# Allegro board IRRIGATION_PROJECT.brd
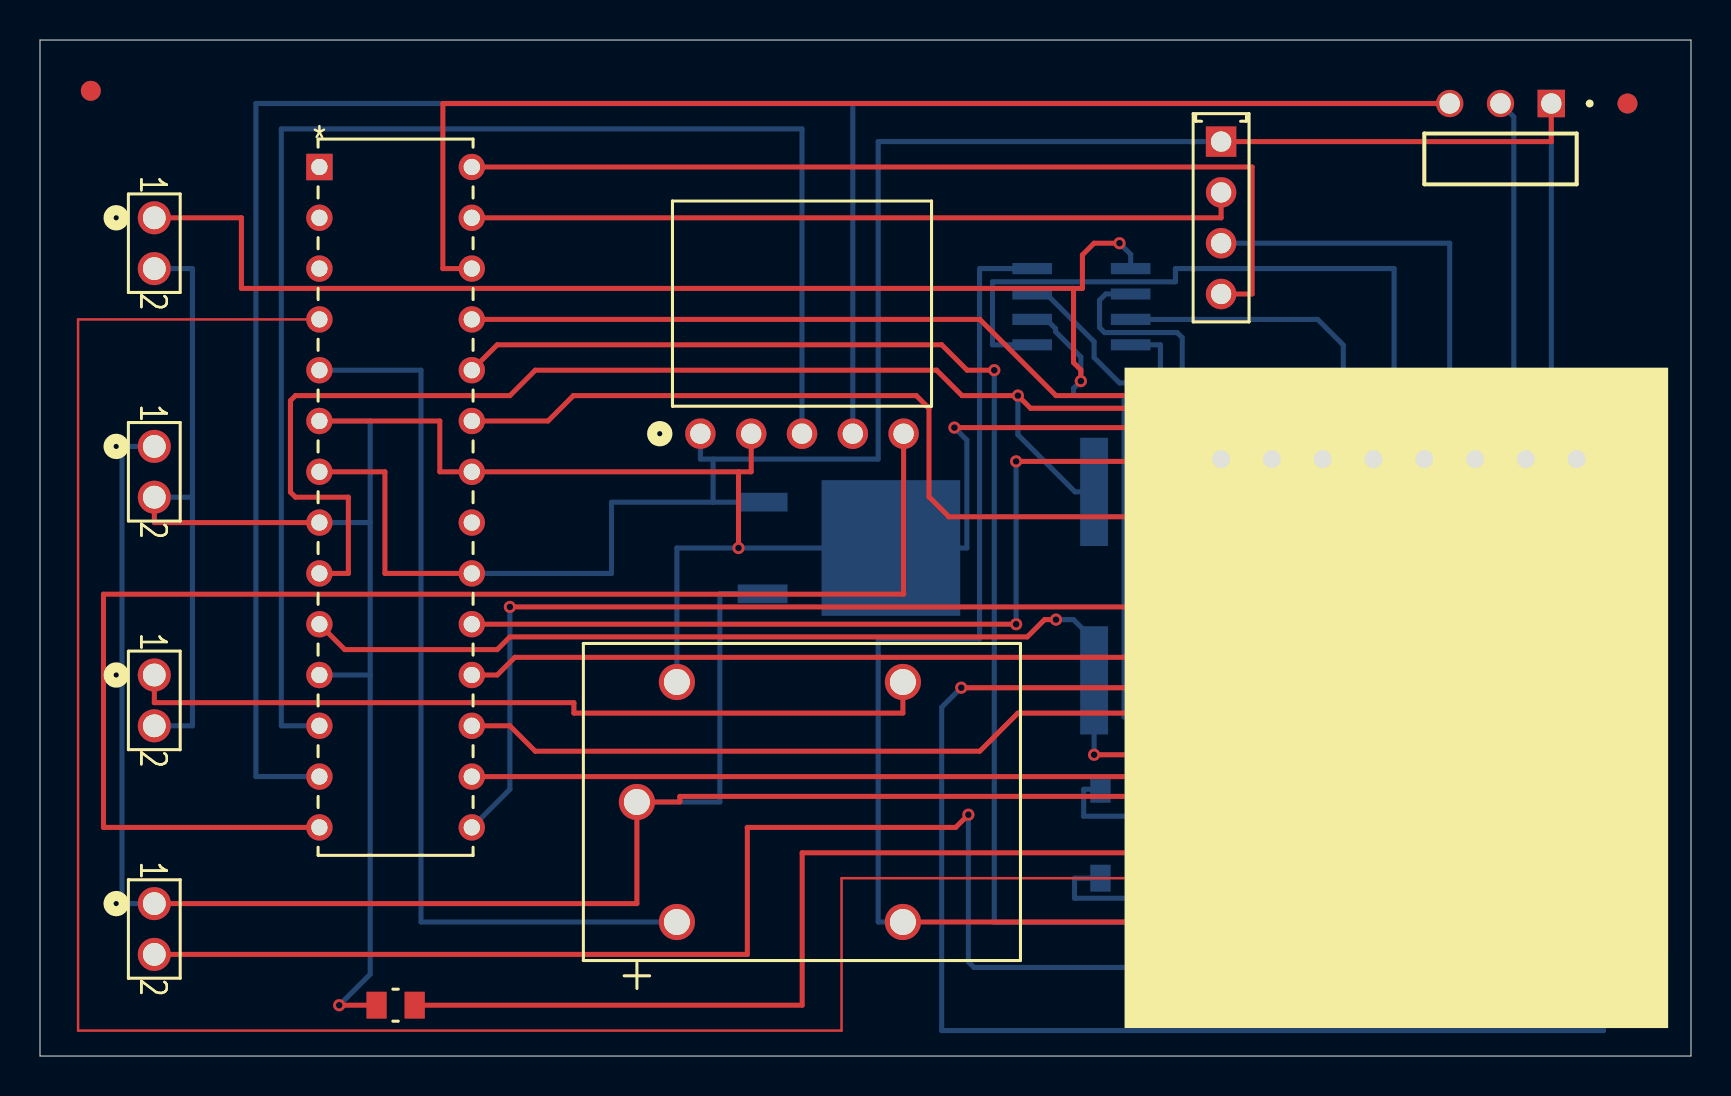
[diagram p0: board, top side]
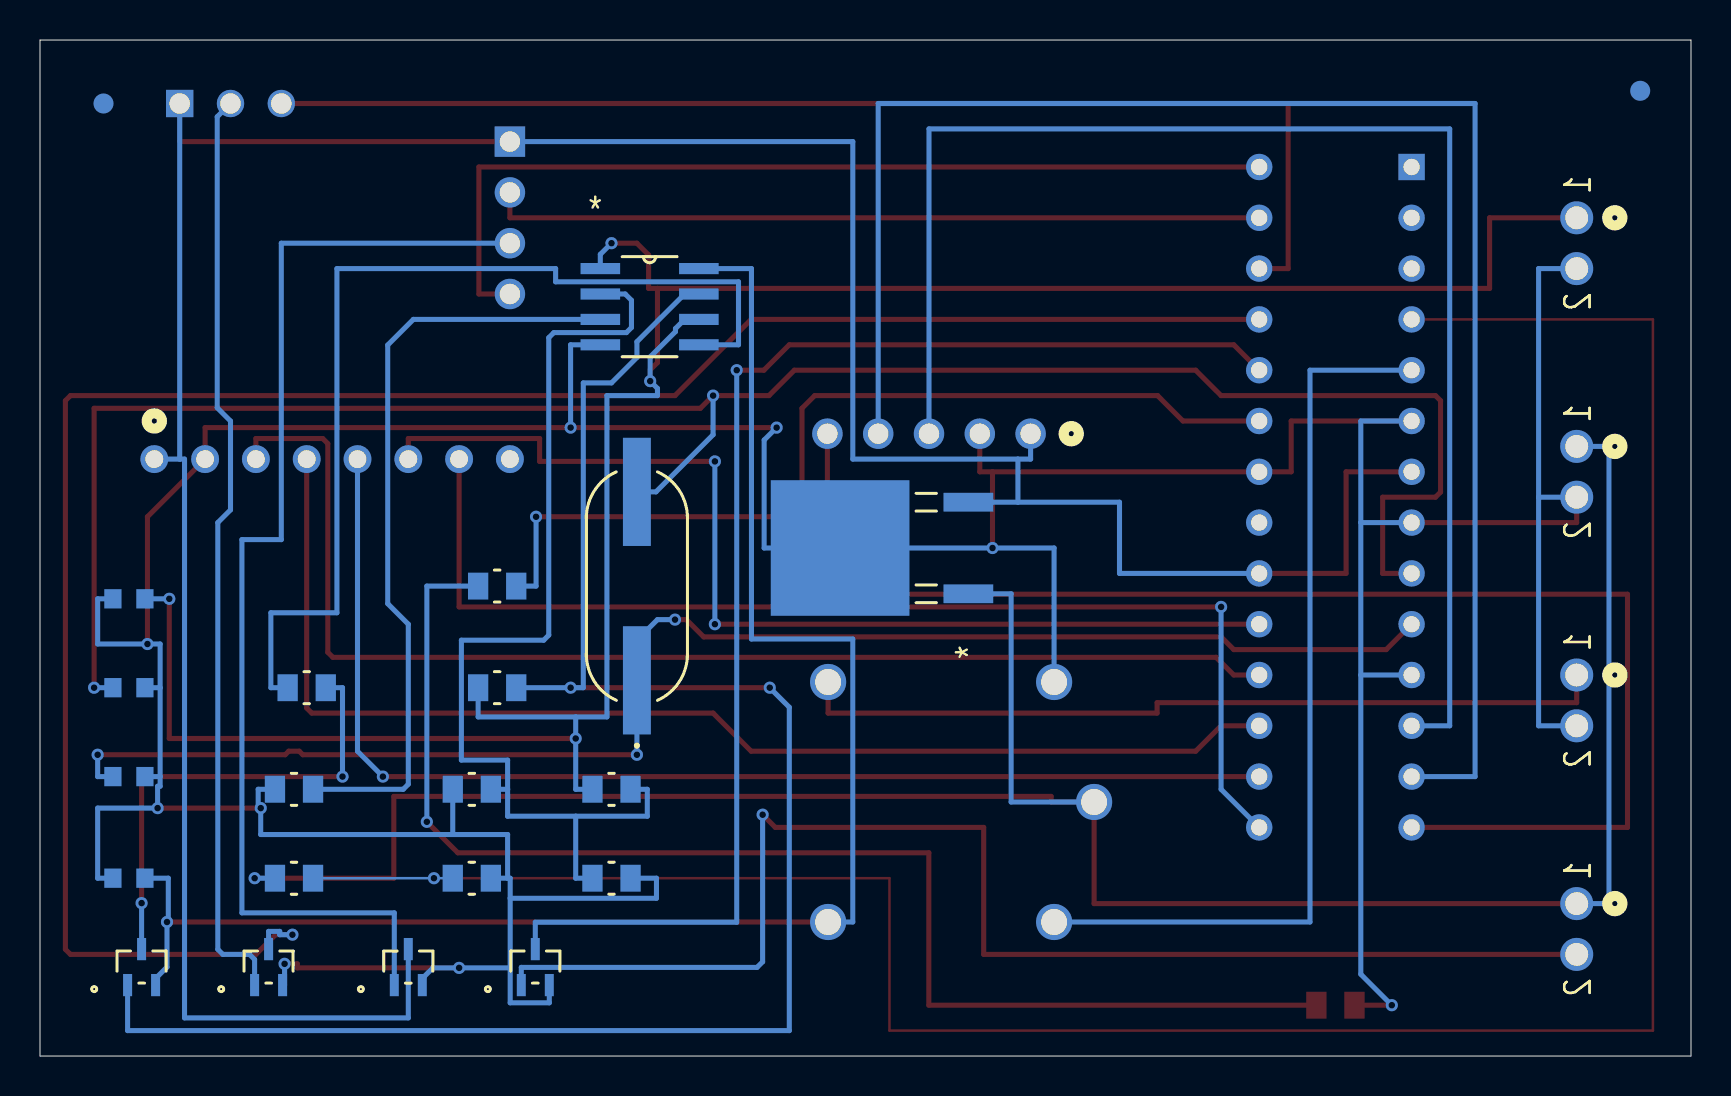
[diagram p1: board, bottom side, seen from below]

Outline 82.55 x 50.8 mm; copper layers: TOP, BOTTOM. Coordinates in mm from the lower left corner of the outline.
Outline path: 0,50.8 82.55,50.8 82.55,0 0,0 0,50.8

## Design rules (mm)
constraint set DEFAULT: min track width 0.127
nets with their own width: min track width 0.254; nets GND N38120 N38132 N38170 N38194 N38286 N38318 N38338 N38498 N38548 N42817 N42837 N43205 N43213 N43273 N43289 N43297 N43349 N43399 N43483 N43487 N43499 N43549 N43557 N43597 N43605 N43613 N43625 N43633 N435731 SOL+ SOL-

## Placement (name value [footprint] x y rotation side)
B1  12vDc  [CONN_5-146280-2_TYCO]  5.71 41.91 270 top
B2  Bat.  [CONN_5-146280-2_TYCO]  5.71 30.48 270 top
C1  1u  [0603_AVX]  78.11 8.89 180 bottom
C2  22pF  [0603_AVX]  78.11 13.97 180 bottom
C3  22pF  [0603_AVX]  78.11 18.41 180 bottom
C4  .1u  [0603_AVX]  78.11 22.86 180 bottom
CLK2  16Mhz  [XTAL_HC49SM-8-30-50-60-16-AT00]  52.7 23.5 90 bottom
D1  PWR_LED  [0805_PAN]  17.78 2.54 0 top
DHT1  DHT20  [CON4_1X4_P100UM_HDR2_TYC]  59.05 45.72 270 top
J2  solenoid  [CONN_5-146280-2_TYCO]  5.71 7.62 270 top
J3  SP+  [CONN_5-146280-2_TYCO]  5.71 19.05 270 top
K1  RELAY_G5LE-1DC5  [RELAY_G5LE-1DC5_OMR]  29.84 12.7 90 top
MS1  Moisture Sensor  [SAMTEC_TSW-103-25-S-S-RA]  75.56 47.62 0 top
NM1  NMOS  [SOT-323_DIO]  57.78 4.45 180 bottom
NM2  NMOS  [SOT-323_DIO]  64.14 4.45 180 bottom
NM3  NMOS  [SOT-323_DIO]  71.12 4.45 180 bottom
NM4  PMOS  [SOT-323_DIO]  77.47 4.45 180 bottom
NOREF  -  [unnamed]  79.38 47.62 0 top
NOREF#2  -  [unnamed]  2.54 48.26 0 top
NOREF#3  -  [unnamed]  2.54 48.26 180 bottom
NOREF#4  -  [unnamed]  79.38 47.62 180 bottom
R1  1k  [0805_PAN]  59.69 23.5 180 bottom
R2  .2  [0805_PAN]  59.69 18.41 180 bottom
R3  1k  [0805_PAN]  69.22 18.41 180 bottom
R4  15k  [0805_PAN]  60.96 13.34 180 bottom
R5  2k  [0805_PAN]  69.85 13.34 180 bottom
R6  4.6k  [0805_PAN]  53.98 13.34 180 bottom
R7  470  [0805_PAN]  69.85 8.89 180 bottom
R8  658  [0805_PAN]  60.96 8.89 180 bottom
RTHERM  4.7k  [0805_PAN]  53.98 8.89 180 bottom
SD1  SD_Card  [CON8_1X8_TU_TSW]  67.94 29.84 180 top
U1  ATMEGA328-PU  [28P3_SPDIP28_SP_MCH]  13.97 44.45 0 top
U2  LVR  [DPAK-3_ONS]  42.55 25.4 90 bottom
U3  HC-05  [CON5_1X5_P100RM_SHDR_TYC]  33.02 31.11 0 top
U4  BQ2057W_D_8  [D8]  52.07 37.47 180 bottom

## Library data of the parts
B1 B2 = Battery
C1 C2 = C: User Part Number: PN; Tolerance: TOL
C3 C4 = C
CLK2 = Clock
D1 = MBR7545
DHT1 = DHT20
J2 J3 = 2-pin_header
K1 = G5LE-1DC24
MS1 = Moisture Sensor
NM1-NM4 = N-channel mosfet
R1 R3-R8 = R
R2 = R: User Part Number: PN
RTHERM = R: User Part Number: PN; Tolerance: TOL
SD1 = SD_Card
U1 = ATMEGA328-PU
U2 = LVR: User Part Number: PN; Tolerance: TOL
U3 = HC-05
U4 = BQ2057WSNTR

## Footprints (pads in the part's own frame, mm; a bottom-side part is the same pattern mirrored in y, then rotated)
28P3_SPDIP28_SP_MCH
  rect 1.321x1.321 hole 0.813: 1(0,0)
  round 1.321 hole 0.813: 2(0,-2.54) 3(0,-5.08) 4(0,-7.62) 5(0,-10.16) 6(0,-12.7) 7(0,-15.24) 8(0,-17.78) 9(0,-20.32) 10(0,-22.86) 11(0,-25.4) 12(0,-27.94) 13(0,-30.48) 14(0,-33.02) 15(7.62,-33.02) 16(7.62,-30.48) 17(7.62,-27.94) 18(7.62,-25.4) 19(7.62,-22.86) 20(7.62,-20.32) 21(7.62,-17.78) 22(7.62,-15.24) 23(7.62,-12.7) 24(7.62,-10.16) 25(7.62,-7.62) 26(7.62,-5.08) 27(7.62,-2.54) 28(7.62,0)
0603_AVX
  rect 0.864x0.965 smd: 1(-0.8,0) 2(0.8,0)
0805_PAN
  rect 1.016x1.346 smd: 1(-0.953,0) 2(0.953,0)
CON4_1X4_P100UM_HDR2_TYC
  rect 1.524x1.524 hole 1.016: 1(0,0)
  round 1.524 hole 1.016: 2(2.54,0) 3(5.08,0) 4(7.62,0)
CON5_1X5_P100RM_SHDR_TYC
  round 1.524 hole 1.016: 1(0,0) 2(2.54,0) 3(5.08,0) 4(7.62,0) 5(10.16,0)
CON8_1X8_TU_TSW
  round 1.397 hole 0.889: 1(-8.89,0) 2(-6.35,0) 3(-3.81,0) 4(-1.27,0) 5(1.27,0) 6(3.81,0) 7(6.35,0) 8(8.89,0)
CONN_5-146280-2_TYCO
  round 1.651 hole 1.143: 1(0,0) 2(2.54,0)
D8
  rect 1.981x0.559 smd: 1(-2.464,1.905) 2(-2.464,0.635) 3(-2.464,-0.635) 4(-2.464,-1.905) 5(2.464,-1.905) 6(2.464,-0.635) 7(2.464,0.635) 8(2.464,1.905)
DPAK-3_ONS
  rect 0.94x2.489 smd: 1(-2.29,-6.413) 3(2.29,-6.413)
  rect 6.782x6.934 smd: 2(0,0)
RELAY_G5LE-1DC5_OMR
  round 1.808 hole 1.3: 1(0,0) 2(-6,-2) 3(-6,-13.3) 4(6,-13.3) 5(6,-2)
SAMTEC_TSW-103-25-S-S-RA
  rect 1.37x1.37 hole 1.02: 01(0,0)
  round 1.37 hole 1.02: 02(-2.54,0) 03(-5.08,0)
SOT-323_DIO
  rect 0.451x1.111 smd: 1(-0.7,-0.9) 2(0.7,-0.9) 3(0,0.9)
unnamed
  round 1.001 smd: (0,0)
XTAL_HC49SM-8-30-50-60-16-AT00
  rect 5.41x1.397 smd: 1(-4.712,0) 2(4.712,0)

## Nets
GND: B1.2(-) B2.2(-) C1.1 C2.2 C3.2 C4.1 D1.1(2) J3.2 K1.5 NM1.2 NM2.2 NM3.2 R4.1 R5.1 R8.2 RTHERM.2 SD1.2(GND) U1.6 U1.8 U1.11 U1.22 U2.2 U3.2 U4.4(VSS)
SOL+: B2.1 J2.1 K1.1 R7.1 U2.1
SOL-: J2.2 NM1.1
N38120: B1.1 C4.2 R2.1 R6.1 U4.1 U4.6
N38132: NM4.1 R2.2 U4.7
N38170: C1.2 K1.3 NM4.2 U4.8
N38194: NM4.3 R3.2
N38286: R3.1 U4.5
N38318: R5.2 U4.3
N38338: R4.2 R6.2 RTHERM.1 U4.2
N38498: J3.1 K1.4
N38548: K1.2 U1.5
N38656: R7.2 R8.1 U1.4
N42817: NM1.3 U1.24
N42837: DHT1.1(VCC) MS1.01(VCC) NM2.3 SD1.1 U1.7(VCC) U1.20 U2.3(OUTPUT) U3.1(VCC)
N43205: C3.1 CLK2.2 U1.9
N43213: DHT1.4 U1.28
N43273: DHT1.2 U1.27
N43289: DHT1.3 NM2.1
N43297: MS1.03 U1.26
N43349: NM3.3 U1.25
N43399: R1.2 U1.23
N43483: C2.1 CLK2.1 U1.10
N43487: SD1.6 U1.19
N43499: SD1.3 U1.18
N43549: U1.12 U3.3
N43557: SD1.4 U1.17
N43597: U1.13 U3.4
N43605: SD1.5 U1.16
N43613: MS1.02 NM3.1
N43625: U1.14 U3.5
N43633: SD1.7 U1.15
N435731: D1.2 R1.1

Pads without a net: SD1 8; U1 1 2 3 21

## Via types
v1: diameter 0.61, hole 0.33, TOP to BOTTOM, 34 vias

## Routing (per net, layer and track width the routed paths; a pad name or vN(x,y) marks a point on that pad's centre or on a via; arc(x,y) is an arc through that point)
GND: length 264.1
  TOP w0.254: v1(70.32,4.61) 69.69,4.61 69.69,4.41 v1(61.59,4.41) ; U1.8 5.71,26.67 B2.2 ; U1.6 19.99,31.75 19.99,29.21 U1.22 34.92,29.21 ; v1(77.18,20.6) 77.18,26.96 74.3,29.84 74.3,31.42 v1(56.02,31.42) v1(45.72,31.42) ; v1(34.92,25.4) 34.92,29.21 ; 34.92,29.21 35.56,29.21 U3.2 ; D1.1 v1(14.96,2.54) ; v1(76.67,12.4) v1(71.51,12.4)
  BOTTOM w0.254: C1.1 79.67,8.89 79.67,12.4 v1(76.67,12.4) 76.67,13.49 76.54,13.49 76.54,13.97 ; v1(70.32,4.61) 70.32,3.55 NM3.2 ; U1.6 16.51,31.75 16.51,26.67 ; 59.04,7.89 59.04,4.41 ; 59.04,7.89 51.73,7.89 51.73,8.89 RTHERM.2 ; 59.04,7.89 59.04,8.89 59.17,8.89 ; 59.04,4.41 v1(61.59,4.41) 62.9,4.41 63.43,3.88 NM2.2 ; 59.04,4.41 59.04,2.66 57.08,2.66 NM1.2 ; 61.91,11.07 59.17,11.07 59.17,8.89 ; 61.91,11.07 R4.1 ; 61.91,11.07 71.51,11.07 v1(71.51,12.4) 71.64,12.4 71.64,13.34 R5.1 ; 16.51,19.05 16.51,4.09 v1(14.96,2.54) ; 16.51,19.05 16.51,26.67 ; 16.51,19.05 U1.11 ; 7.62,27.94 7.62,16.51 J3.2 ; 7.62,27.94 7.62,39.37 B1.2 ; 7.62,27.94 B2.2 ; 76.54,13.97 76.54,18.41 ; 76.54,13.97 C2.2 ; v1(56.02,31.42) 56.02,35.56 U4.4 ; C3.2 76.54,18.41 ; 76.54,18.41 76.54,20.6 v1(77.18,20.6) 79.67,20.6 79.67,22.86 C4.1 ; 16.51,26.67 U1.8 ; R8.2 59.17,8.89 ; v1(45.72,31.42) 46.34,30.8 46.34,25.4 U2.2 v1(34.92,25.4) 31.84,25.4 K1.5
SOL+: length 119.4
  TOP w0.254: v1(71.82,8.89) 64.86,8.89 64.86,12.98 31.99,12.98 31.99,12.7 K1.1 29.84,7.62 J2.1
  BOTTOM w0.254: R7.1 v1(71.82,8.89) ; U2.1 33.99,23.11 33.99,12.7 K1.1 ; J2.1 4.1,7.62 4.1,30.48 B2.1
SOL-: length 67.7
  TOP w0.254: v1(46.42,12.06) 45.78,11.43 35.37,11.43 35.37,5.08 J2.2
  BOTTOM w0.254: NM1.1 58.49,4.43 46.7,4.43 46.42,4.71 v1(46.42,12.06)
N38120: length 124.9
  TOP w0.254: 51.68,38.38 10.07,38.38 10.07,41.91 B1.1 ; 51.68,38.38 52.12,38.38 52.12,40.06 52.7,40.64 v1(53.98,40.64) ; 51.68,38.38 51.68,34.67 52.04,34.3 v1(52.04,33.74) ; v1(55.77,15.88) 76.09,15.88 v1(76.09,22.86)
  BOTTOM w0.254: U4.6 50.32,36.83 50.78,36.37 50.78,36.22 52.04,34.95 v1(52.04,33.74) 51.68,33.38 51.68,33.02 54.2,33.02 54.2,16.95 55.77,16.95 ; U4.1 54.53,40.08 v1(53.98,40.64) ; 55.77,16.95 v1(55.77,15.88) 55.77,13.34 R6.1 ; 55.77,16.95 60.64,16.95 R2.1 ; C4.2 v1(76.09,22.86)
N38132: length 89.5
  TOP w0.254: v1(46.06,18.41) v1(56.02,18.41)
  BOTTOM w0.254: NM4.1 78.17,1.27 45.09,1.27 45.09,17.44 v1(46.06,18.41) ; R2.2 v1(56.02,18.41) 55.38,18.41 55.38,33.66 53.98,33.66 52.7,34.92 52.7,35.71 50.32,38.1 U4.7
N38170: length 81.5
  TOP w0.254: v1(76.2,6.7) K1.3
  BOTTOM w0.254: K1.3 41.91,6.7 41.91,20.85 46.98,20.85 46.98,39.37 U4.8 ; C1.2 76.13,8.89 76.13,6.7 v1(76.2,6.7) 76.2,4.45 76.77,3.88 NM4.2
N38194: length 24
  TOP w0.254: v1(77.47,7.65) 77.47,13.97 v1(67.42,13.97)
  BOTTOM w0.254: R3.2 67.42,18.41 v1(67.42,13.97) ; NM4.3 v1(77.47,7.65)
N38286: length 51
  BOTTOM w0.254: U4.5 47.62,35.56 47.62,38.71 56.77,38.71 56.77,39.37 67.7,39.37 67.7,22.16 71.01,22.16 71.01,18.41 R3.1
N38318: length 38.4
  BOTTOM w0.254: U4.3 63.88,36.83 65.16,35.55 65.16,22.62 64.14,21.59 64.14,13.59 64.39,13.34 R5.2
N38338: length 51.8
  BOTTOM w0.254: 55.77,11.99 59.17,11.99 59.17,13.34 ; 55.77,11.99 52.18,11.99 52.18,13.34 R6.2 ; 55.77,11.99 55.77,8.89 RTHERM.1 ; U4.2 53.29,38.1 52.98,37.79 52.98,36.42 53.23,36.17 56.86,36.17 57.11,35.92 57.11,21.04 57.37,20.79 61.48,20.79 61.48,14.8 59.17,14.8 59.17,13.34 ; R4.2 59.17,13.34
N38498: length 40.9
  TOP w0.254: K1.4 43.14,17.14 26.7,17.14 26.7,17.67 5.71,17.67 J3.1
N38548: length 45.5
  BOTTOM w0.254: U1.5 19.05,34.29 19.05,6.7 K1.2
N38656: length 123.2
  TOP w0.127: U1.4 1.91,36.83 1.91,1.27 40.08,1.27 40.08,8.89 v1(62.85,8.89)
  BOTTOM w0.127: R8.1 v1(62.85,8.89) R7.2
N42817: length 66.2
  TOP w0.254: U1.24 22.86,35.56 45.09,35.56 46.35,34.29 v1(47.71,34.29)
  BOTTOM w0.254: v1(47.71,34.29) 47.71,6.69 57.78,6.69 NM1.3
N42837: length 156.4
  TOP w0.254: DHT1.1 75.56,45.72 MS1.01 ; U1.7 17.25,29.21 17.25,24.13 U1.20
  BOTTOM w0.254: 33.66,27.69 33.66,29.84 ; 33.66,27.69 28.57,27.69 28.57,24.13 U1.20 ; 33.66,27.69 U2.3 ; 33.66,29.84 33.02,29.84 U3.1 ; 33.66,29.84 41.91,29.84 41.91,45.72 DHT1.1 ; MS1.01 75.56,29.84 ; 75.56,29.84 75.32,29.84 75.32,1.91 64.14,1.91 NM2.3 ; 75.56,29.84 SD1.1
N43205: length 103.4
  TOP w0.254: v1(79.84,18.41) 79.84,32.38 49.53,32.38 v1(48.9,33.02) 46.1,33.02 44.83,34.29 24.77,34.29 23.5,33.02 12.78,33.02 12.52,32.77 12.52,28.19 12.78,27.94 15.42,27.94 15.42,24.13 U1.9
  BOTTOM w0.254: CLK2.2 51.75,28.21 48.9,31.06 v1(48.9,33.02) ; C3.1 v1(79.84,18.41)
N43213: length 46.9
  TOP w0.254: DHT1.4 60.6,38.1 60.6,44.45 U1.28
N43273: length 38.7
  TOP w0.254: DHT1.2 59.05,41.91 U1.27
N43289: length 58.1
  BOTTOM w0.254: DHT1.3 70.48,40.64 70.48,25.82 72.45,25.82 72.45,7.16 64.84,7.16 NM2.1
N43297: length 60
  TOP w0.254: MS1.03 20.14,47.62 20.14,39.37 U1.26
N43349: length 102.9
  TOP w0.254: U1.25 46.99,36.83 50.8,33.02 81.03,33.02 81.28,32.77 81.28,5.33 81.03,5.08 71.75,5.08 70.77,6.07 v1(69.93,6.07)
  BOTTOM w0.254: NM3.3 71.12,6.23 70.56,6.23 70.56,6.07 v1(69.93,6.07)
N43399: length 46.2
  TOP w0.254: U1.23 25.4,31.75 26.67,33.02 43.81,33.02 44.45,32.38 44.45,27.95 45.44,26.96 v1(57.75,26.96)
  BOTTOM w0.254: v1(57.75,26.96) 57.75,23.5 R1.2
N43483: length 75
  TOP w0.254: U1.10 15.24,20.32 22.86,20.32 23.5,20.95 49.36,20.95 50.23,21.82 v1(50.8,21.82) ; v1(52.7,15.06) 69.41,15.06 69.59,15.24 70.11,15.24 70.29,15.06 v1(79.67,15.06)
  BOTTOM w0.254: C2.1 79.67,13.97 v1(79.67,15.06) ; v1(50.8,21.82) 51.68,21.82 52.7,20.79 CLK2.1 v1(52.7,15.06)
N43487: length 52.9
  TOP w0.254: U1.19 v1(48.81,21.59) ; v1(48.81,29.73) 57.57,29.73 57.57,30.87 64.14,30.87 64.14,29.84
  BOTTOM w0.254: v1(48.81,21.59) v1(48.81,29.73)
N43499: length 62.2
  TOP w0.254: SD1.3 71.75,30.87 68.41,30.87 68.16,30.62 68.16,20.19 67.91,19.93 23.74,19.93 22.86,19.05 U1.18
N43549: length 73
  BOTTOM w0.254: U1.12 12.06,16.51 12.06,46.35 38.1,46.35 U3.3
N43557: length 61.5
  TOP w0.254: 69.22,29.84 69.22,17.4 68.96,17.14 48.9,17.14 46.99,15.24 24.77,15.24 23.5,16.51 U1.17
N43597: length 83.2
  BOTTOM w0.254: U3.4 40.64,47.62 10.79,47.62 10.79,13.97 U1.13
N43605: length 60.2
  TOP w0.254: U1.16 v1(65.41,13.97)
  BOTTOM w0.254: SD1.5 66.67,15.24 v1(65.41,13.97)
N43613: length 46.4
  BOTTOM w0.254: MS1.02 73.69,46.96 73.69,32.41 73.03,31.75 73.03,27.3 73.66,26.67 73.66,5.33 73.41,5.08 72.07,5.08 71.82,4.83 NM3.1
N43625: length 70.5
  TOP w0.254: U1.14 3.17,11.43 3.17,23.09 43.18,23.09 U3.5
N43633: length 57.3
  TOP w0.254: v1(23.5,22.45) 61.59,22.45 61.59,29.84
  BOTTOM w0.254: v1(23.5,22.45) 23.5,13.34 U1.15
N435731: length 67.1
  TOP w0.254: D1.2 38.11,2.54 38.11,10.16 61.66,10.16 v1(63.21,11.71)
  BOTTOM w0.254: R1.1 63.21,23.5 v1(63.21,11.71)

## Text on the board
USER_PART_NUM_BOTTOM: FIGURE | FINISHED_SIZE | 13.0 | 32.0 | 35.0 | 40.0 | 40.16 | 45.0 | 51.18 | DRILL CHART: TOP to BOTTOM | ALL UNITS ARE IN MILS | PLATED | QTY | 34 | 28 | 8 | 9 | 3 | 5
